# Altium PCB signal_circuit_PCB.PcbDoc
Units mil, origin at the board's own origin, x right, y up, seen from the top; angles counter-clockwise.
Board outline 1021.03 x 2013.03 mil, 2 copper layers (Top Layer, Bottom Layer); 26 components, 14 nets, 80 pads, 13 vias.
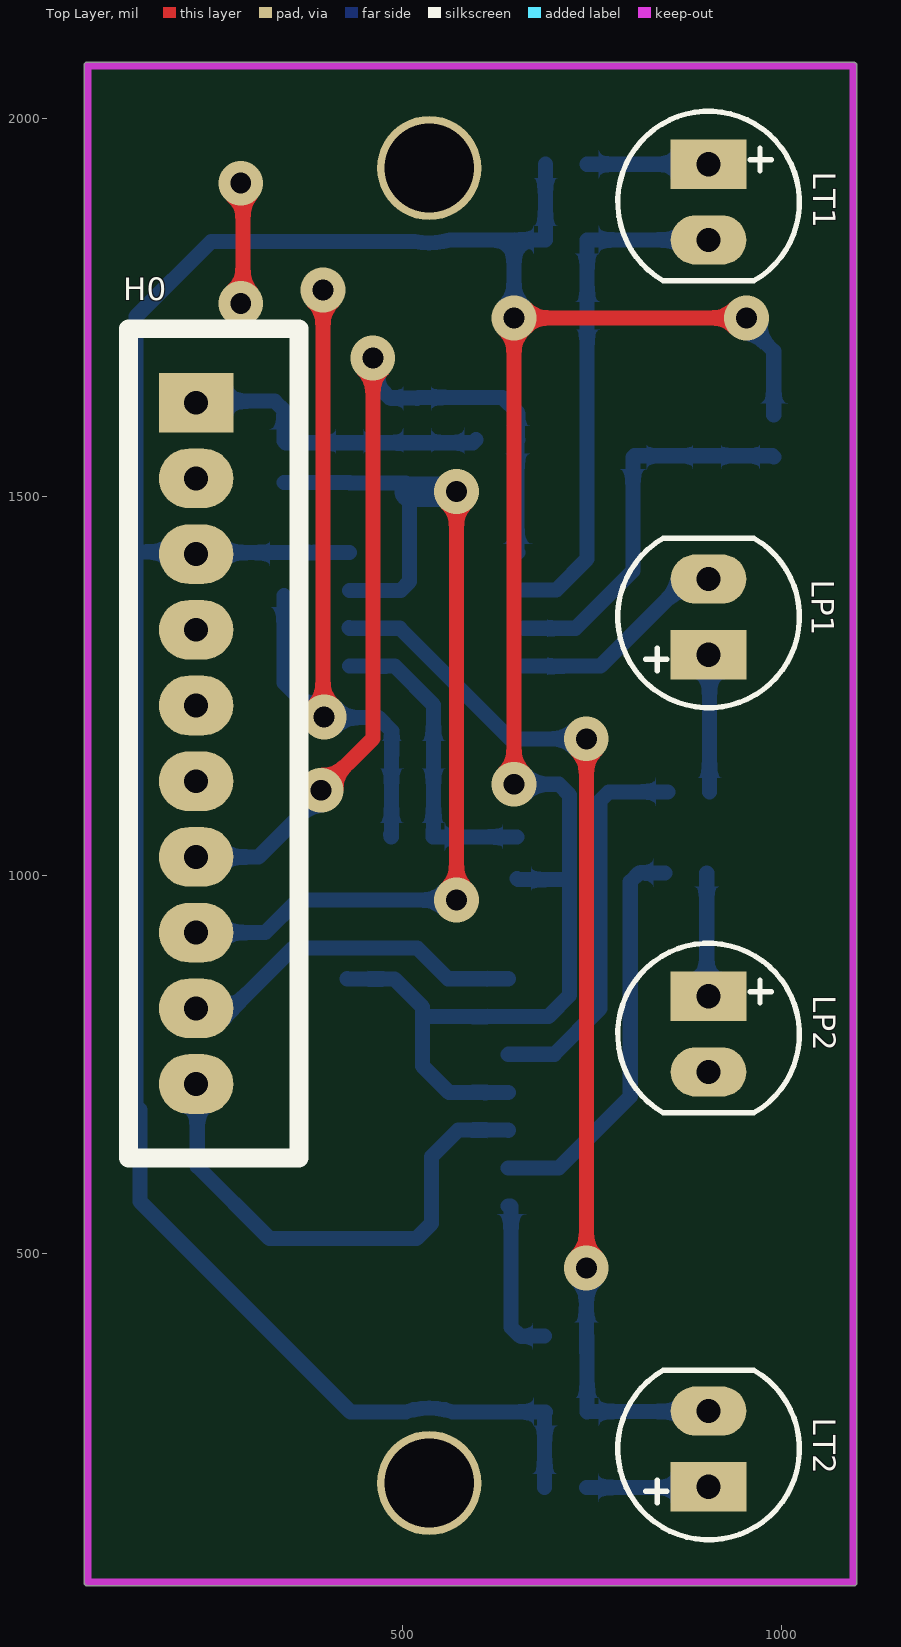
[diagram p0: Top Layer view]
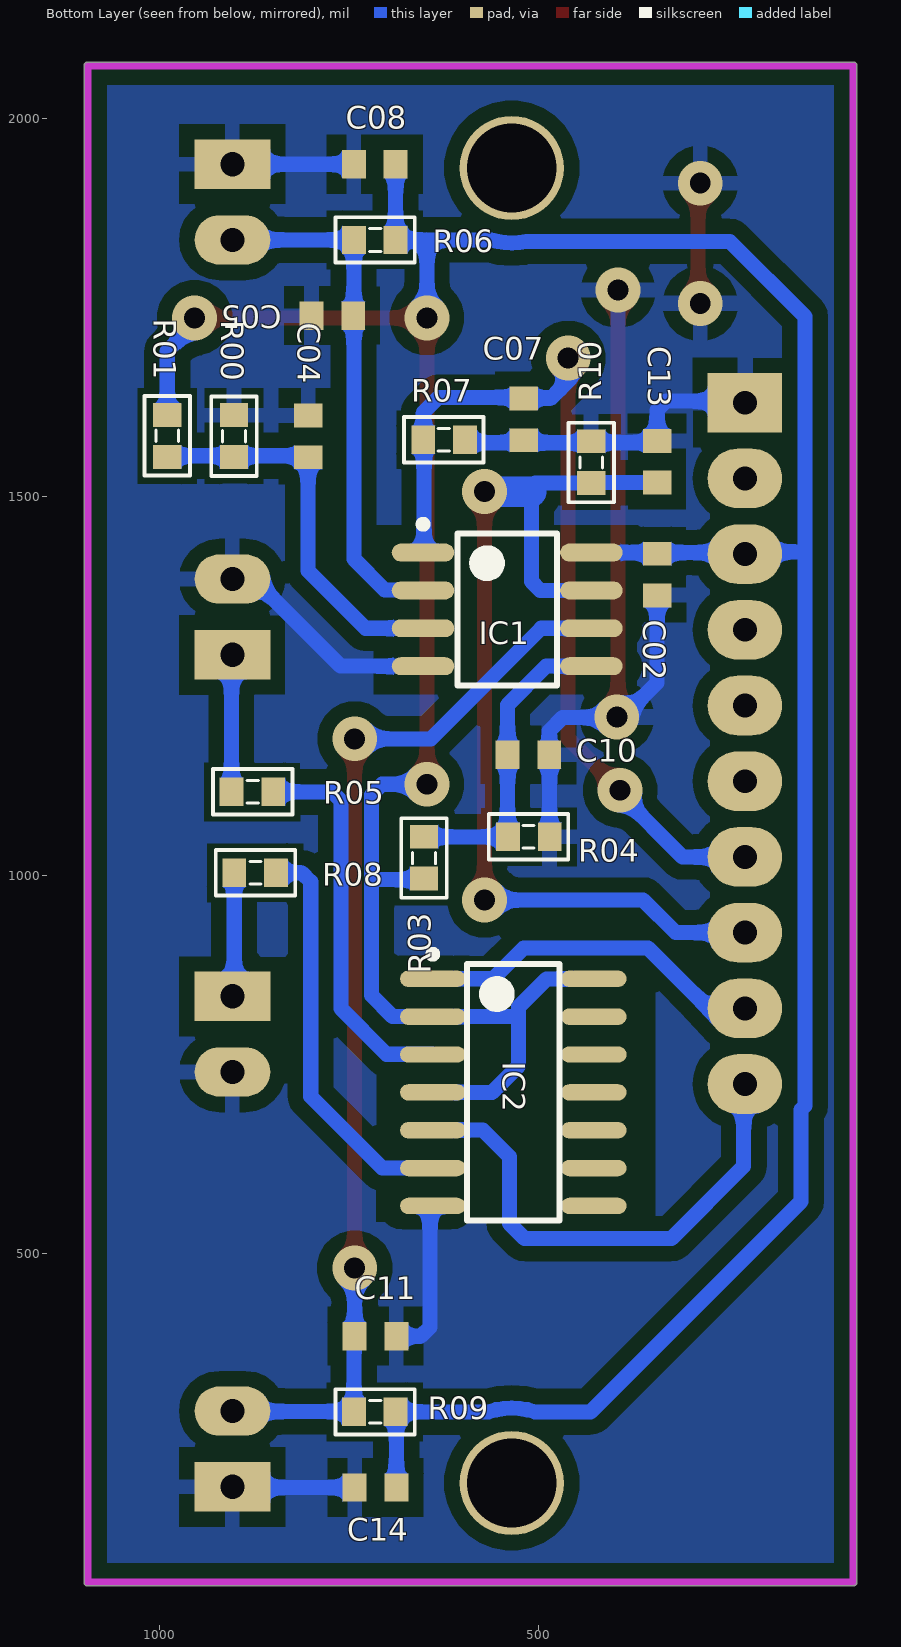
[diagram p1: Bottom Layer view, seen from below]
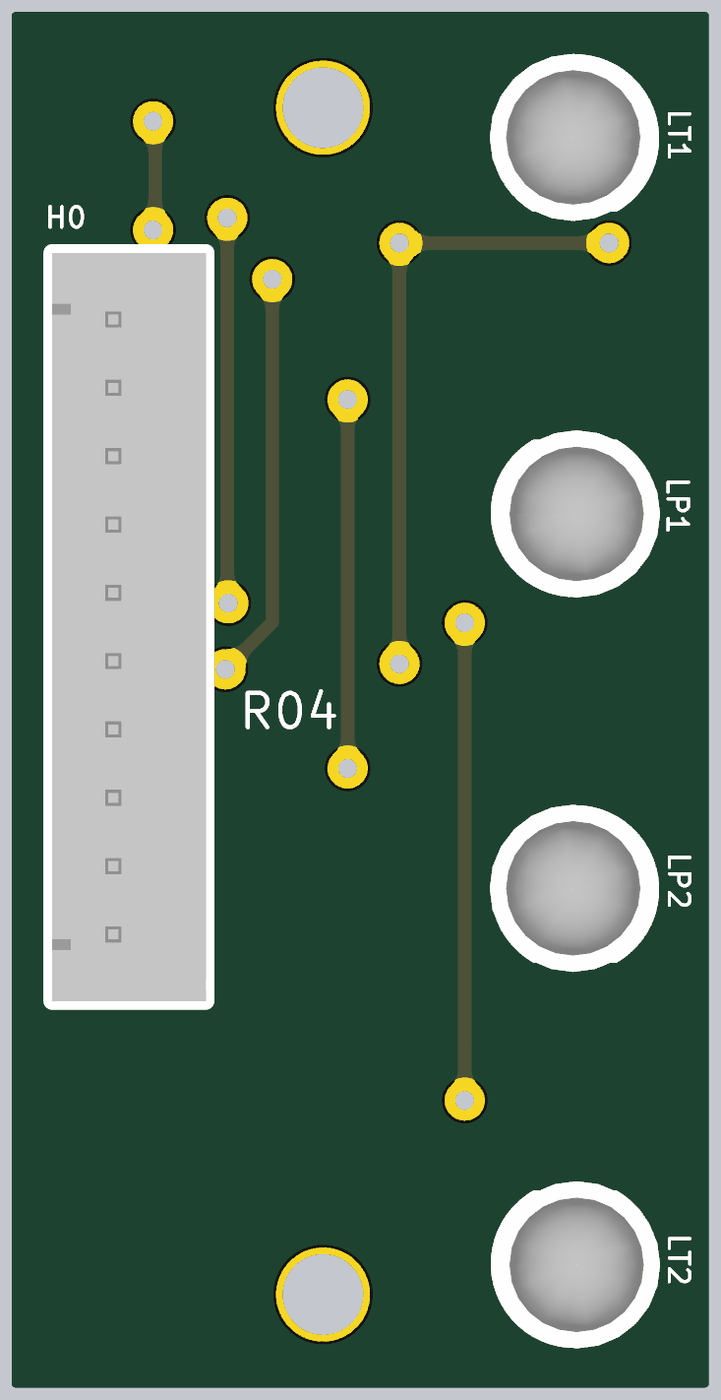
[diagram p2: 3D render of the assembled board from above, using the file's embedded part models]
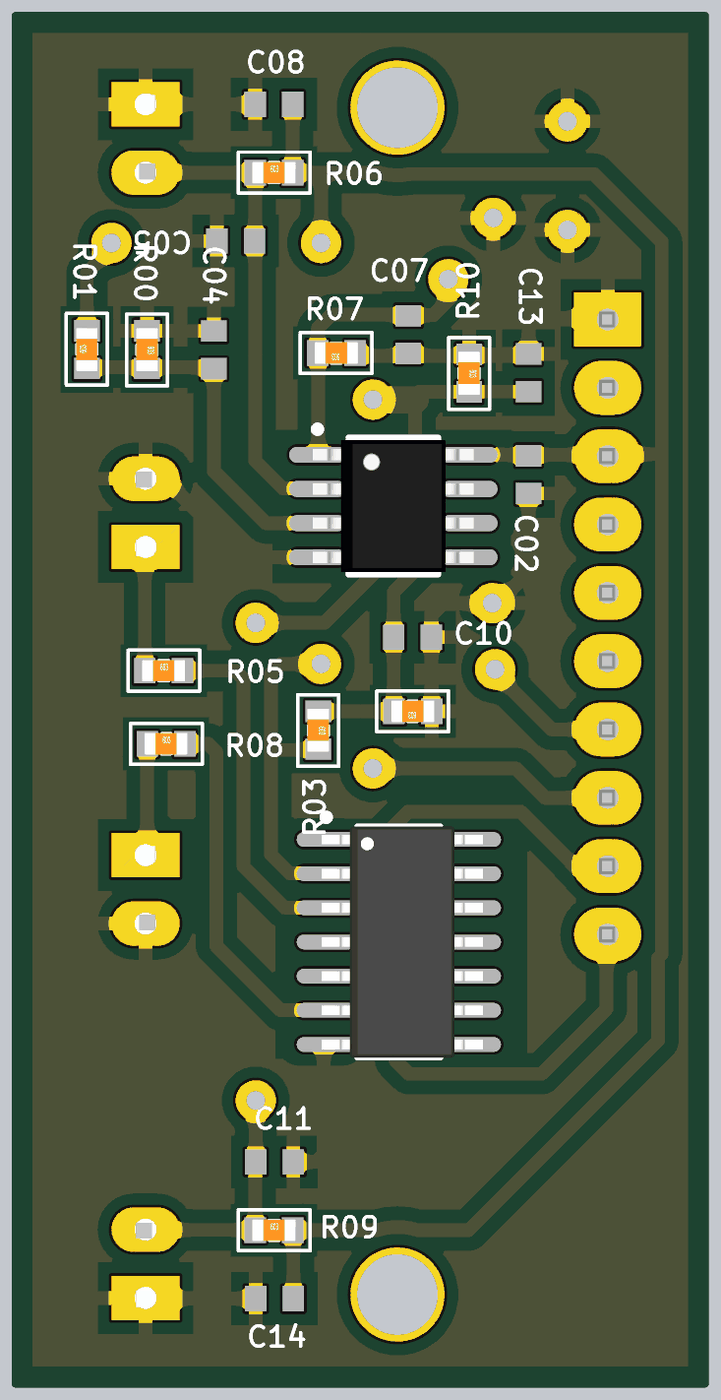
[diagram p3: 3D render of the assembled board from below, using the file's embedded part models]

## Layer stack, top to bottom
Top Solder: solder mask 0.4, Solder Resist, Dk 3.5
Top Layer: signal copper 1.4
Dielectric 1: dielectric 12.6, FR-4, Dk 4.8
Bottom Layer: signal copper 1.4
Bottom Solder: solder mask 0.4, Solder Resist, Dk 3.5

## Board outline
78.98,66 ccw(c84,66) 84,60.99 1095,60.99 ccw(c1095,66) 1100.02,66 1100.02,2069 ccw(c1095,2069) 1095,2074.02 84,2074.02 ccw(c84,2069) 78.99,2069

## Design rules (kind name [scope] priority, off if disabled: settings)
Clearance [All] p1: gap=20 ignorepadtopadclearanceinfootprint=FALSE
PolygonConnect [All] p1: connectstyle=Relief reliefconductorwidth=20 reliefentries=4 polygonreliefangle="90 Angle" airgapwidth=20
RoutingVias [All] p1: holewidth=28 width=50 viastyle="Through Hole" minholewidth=10 minwidth=10 maxholewidth=28 maxwidth=118.11
SolderMaskExpansion [All] p1: expansion=4 istentingtop=FALSE
Width [All] p1: maxlimit=50 minlimit=10 preferedwidth=20 minimp=50.000000 maximp=50.000000 favimp=50.000000
30 further rules are at their usual default settings.

## Components (designator, comment, footprint, x,y, rotation, side; value= is the part's Value field where it differs from the comment)
C02 "Cap Non-Pol SMD" CAP-SM-0603 343,1397 r270 bottom value=0.1uF
C04 "Cap Non-Pol SMD" CAP-SM-0603 804,1579.56 r270 bottom value=0.1uF
C05 "Cap Non-Pol SMD" CAP-SM-0603 772,1739 r0 bottom value=0.1uF
C07 "Cap Non-Pol SMD" CAP-SM-0603 519,1602 r270 bottom value=0.1uF
C08 "Cap Non-Pol SMD" CAP-SM-0603 716,1939 r0 bottom value=0.1uF
C10 "Cap Non-Pol SMD" CAP-SM-0603 513,1159 r180 bottom value=0.1uF
C11 "Cap Non-Pol SMD" CAP-SM-0603 715,391 r180 bottom value=0.1uF
C13 "Cap Non-Pol SMD" CAP-SM-0603 343,1546 r90 bottom value=0.1uF
C14 "Cap Non-Pol SMD" CAP-SM-0603 715,191 r0 bottom value=0.1uF
H0 "RIGHT" XH2.54M-10 227,1624 r270 top
IC1 "LM358" SO8 541,1351 r180 bottom
IC2 "7408" SO14 533,713 r180 bottom
LP1 "LED 5mm" LED-5MM-WHITE 904,1341.04 r90 top
LP2 "LED 5mm" LED-5MM-WHITE 904,789.96 r270 top
LT1 "LED 5mm" LED-5MM-WHITE 904,1889 r270 top
LT2 "LED 5mm" LED-5MM-WHITE 904,242 r90 top
R00 "RESISTOR SMD" RES-SM-0603 901.9,1607 r270 bottom value=27k
R01 "RESISTOR SMD" RES-SM-0603 990,1553 r90 bottom value=18k
R03 "RESISTOR SMD" RES-SM-0603 651,1050 r270 bottom value=18k
R04 "RESISTOR SMD" RES-SM-0603 485.44,1050.55 r0 bottom value=27k
R05 "RESISTOR SMD" RES-SM-0603 904.56,1110 r180 bottom value=220
R06 "RESISTOR SMD" RES-SM-0603 743,1839 r180 bottom value=10K
R07 "RESISTOR SMD" RES-SM-0603 597.44,1575 r0 bottom value=10K
R08 "RESISTOR SMD" RES-SM-0603 901,1003 r180 bottom value=220
R09 "RESISTOR SMD" RES-SM-0603 743,291 r180 bottom value=10K
R10 "RESISTOR SMD" RES-SM-0603 430,1572.56 r270 bottom value=10K

## Footprints (in the part's own frame and the unit in brackets; to place one, negate y for a bottom-side part, rotate by r counter-clockwise, add the part's x,y. Pads: shape width x height; smd on the part's side, far side on the other; paste and mask are expansions set on the pad)
CAP-SM-0603 [mm] "SMD Ceramic Capacitor Size 0603"
  rect 0.8x0.95 smd: 1(-0.7,0) 2(0.7,0)
  body extent -0.85,-0.45 0.85,0.45, height 0.6
LED-5MM-WHITE [mil] "LED 2 PIN, 5 ly , Only colour, pin to pin 110mil"
  rect 65x100 hole 32: 1(-50,0)
  oval 65x100 hole 32: 2(50,0)
  silkscreen extent -120,-120 104,120, body extent -124,-125 121,120, height 340
RES-SM-0603 [mm]
  rect 0.8x0.95 smd: 1(-0.014,0) 2(1.386,0)
  silkscreen extent -0.64,-0.76 2.03,0.76, body extent -0.11,-0.4 1.49,0.4, height 0.3
SO8 [mm] "SOIC, 8-Leads, Body 4.9x3.9mm, Pitch 1.27mm, IPC High Density"
  oval 2.1x0.6 smd: 1(-2.825,1.905) 2(-2.825,0.635) 3(-2.825,-0.635) 4(-2.825,-1.905) 5(2.825,-1.905) 6(2.825,-0.635) 7(2.825,0.635) 8(2.825,1.905)
  silkscreen extent -2.95,-2.55 1.68,2.98, body extent -2.99,-2.45 3,2.45, height 1.6
SO14 [mm] "SOIC, 14-Leads, Body 8.60x3.90mm, Pitch 1.27mm, IPC Medium Density"
  oval 2.2x0.55 smd: 1(-2.7,3.81) 2(-2.7,2.54) 3(-2.7,1.27) 4(-2.7,0) 5(-2.7,-1.27) 6(-2.7,-2.54) 7(-2.7,-3.81) 8(2.7,-3.81) 9(2.7,-2.54) 10(2.7,-1.27) 11(2.7,0) 12(2.7,1.27) 13(2.7,2.54) 14(2.7,3.81)
  silkscreen extent -2.83,-4.3 1.55,4.76, body extent -2.87,-4.3 3.13,4.3, height 1.75
XH2.54M-10 [mm]
  rect 2x2.5 hole 0.8: 1(0,0)
  oval 2x2.5 hole 0.8: 2(2.54,0) 3(5.08,0) 4(7.62,0) 5(10.16,0) 6(12.7,0) 7(15.24,0) 8(17.78,0) 9(20.32,0) 10(22.86,0)
  silkscreen extent -2.48,-2.26 25.34,3.46, body extent -2.48,-2.26 25.34,3.48, height 6.91

## Part data
C02 C04 C05 C07 C08 C10 C11 C13 C14: "Capacitor"
H0: library part "Header 10P 2.54 Duc Thang", "Cắm", Chung_Loai=Cắm, Don_Vi=Con, Ma_Hang=MH001286, Ten_Linh_Kien="Header 10P XH2.54-10P Đực Thẳng"
IC1: "Low-Power Dual Operational Amplifier"
IC2: "Quad 2-Input AND Gate"
LP1 LP2 LT1 LT2: library part "LED 5mm Trang", "Cắm", Chung_Loai=Cắm, Don_Vi=Con, Ma_Hang=MH008983, Ten_Linh_Kien="Led 5MM Trắng Đục (1000c)"
R00 R01 R03 R04 R05 R06 R07 R08 R09 R10: "Resistor"

## Free pads (board coordinates)
  round 137.8 hole 118.11: 15(535,197) 15(535,1934)

## Via types
v1: diameter 59.06, hole 27.56, Top Layer to Bottom Layer, 13 vias

## Nets (pads, with @x,y where several pads share a name; then routed paths per layer and width w, separated by ;. In a path a pad name is that pad's centre, name@x,y a point inside that pad or via, vN(x,y) a via of type N, cw(c..) or ccw(c..) an arc to the next point about the centre after c; other vN are vias at no path point)
GND: C02.2 C04.1 C05.2 C07.2 C08.2 C10.2 C11.2 C13.2 C14.2 H0.1 IC1.4 IC2.7 LP1.2 LP2.2 LT1.1 LT2.1 R00.1 R04.1 R07.1 R10.1 | length 2405.3
  Top Layer w20: v1(286,1755) 289,1758 289,1910.98 v1(285.98,1914) ; v1(394.74,1772.74) 394.74,1210.26 v1(396.15,1208.85)
  Bottom Layer w20: H0.1 233,1624 235,1626 331,1626 343,1614 C13.2 345.56,1571 592.88,1571 R07.1 ; C02.2 343,1254.03 388.18,1208.85 v1(396.15,1208.85) 397.04,1207.96 467.98,1207.96 485.44,1190.49 C10.2 485.16,1158.72 485.16,1054.82 484,1053.66 484.88,1052.78 R04.1 ; IC2.7 642.24,563 643,562.24 643,402.72 654.72,391 C11.2 ; IC1.4 761,1276 876.04,1391.04 LP1.2 ; C14.2 882,191 883,190 885,192 LT2.1 ; C08.2 LT1.1
IR_S1: C07.1 H0.7 IC1.1 R07.2 | length 1231.5
  Top Layer w20: v1(392.01,1112.09) 460.53,1180.61 v1(460.53,1682.92)
  Bottom Layer w20: H0.7 309.37,1024 390.91,1105.54 v1@390.91,1112.09 ; v1(460.53,1682.92) 456.57,1678.96 456.57,1656.43 482.78,1630.22 518.34,1630.22 C07.1 520.44,1631 632,1631 651.56,1611.44 651.56,1575.44 R07.2 ; R07.2@651,1574 651,1427.22 IC1.1
IR_S2: C13.1 H0.8 IC1.7 R10.2 | length 1334.5
  Top Layer w20: v1(571,967) v1(570.98,1506.79)
  Bottom Layer w20: H0.8 318.43,924 361.43,967 v1(571,967) ; C13.1 R10.2@430,1518.44 ; IC1.7 497.28,1376 509,1387.72 509,1506.28 ; R10.2 504,1518 509,1513
  Bottom Layer w40: 509,1506.28 570.48,1506.28 v1(570.98,1506.79)
LP1: H0.9 IC2.1 | length 462.3
  Bottom Layer w20: H0.9 275,824 354.83,903.83 519.17,903.83 560,863 IC2.1
LP2: H0.10 IC2.5 | length 670.5
  Bottom Layer w20: H0.10 228.66,722.34 228.66,615.34 324,520 518,520 538,540 538,628 573.32,663.32 638.98,663.32 IC2.5
NetC04_2: C04.2 IC1.3 R00.2 R01.1 | length 513
  Bottom Layer w20: IC1.3@660,1326 728,1326 804,1402 C04.2 806,1554 988.44,1554 R01.1
NetC05_1: C05.1 IC1.2 LT1.2 R06.1 | length 690.4
  Bottom Layer w20: IC1.2 652.91,1376.69 702.69,1376.69 743.56,1417.56 743.56,1739 R06.1 LT1.2
NetC10_1: C10.1 IC1.5 R03.1 R04.2 | length 417.5
  Bottom Layer w20: IC1.5 489.43,1276 540.56,1224.87 540.56,1059.25 540,1058.69 R04.2 646.93,1050.56 R03.1
NetC11_1: C11.1 IC1.6 LT2.2 R09.1 | length 1430.2
  Top Layer w20: v1(742.56,481) v1(742.56,1180)
  Bottom Layer w20: IC1.6@429.09,1326.69 IC1.6 496,1326 642,1180 v1(742.56,1180) v1@740.56,1182 ; v1(742.56,481) C11.1 743,390.56 743,370 743.56,369.44 R09.1 744.06,291.5 875.5,291.5 879,288 883,292 LT2.2
NetIC2_3: IC2.3 R05.2 | length 515.4
  Bottom Layer w20: IC2.3 639.62,763.32 700.23,763.32 760.48,823.57 760.48,1098.28 772.2,1110 R05.2
NetIC2_6: IC2.6 R08.2 | length 534.9
  Bottom Layer w20: IC2.6 706,613 800.48,707.48 800.48,991.28 812.2,1003 R08.2
NetLP1_1: LP1.1 R05.1 | length 181.5
  Bottom Layer w20: LP1.1 905.12,1289.92 R05.1
NetLP2_1: LP2.1 R08.1 | length 164.1
  Bottom Layer w20: R08.1 901.56,842.4 LP2.1
VCC: C02.1 C08.1 C14.1 H0.3 IC1.8 IC2.2 IC2.4 IC2.14 R01.2 R03.2 R06.2 R09.2 | length 5001
  Top Layer w20: v1(647,1120) v1(647.01,1736) 935.01,1735.99 v1@954,1717
  Bottom Layer w20: 153,1427 227,1427 228,1426 227,1425 H0.3 263,1424 265,1426 343,1426 IC1.8 ; IC2.14 427.02,862.68 489.32,862.68 526,826 526,748 561,713 IC2.4 ; 528,813 IC2.2 639.62,813.32 692.51,813.32 720.48,841.29 720.48,1105.8 706.28,1120 v1(647,1120) ; v1(647.01,1736) 647,1839 ; R03.2 652.44,994 719,994 ; C14.1 687.44,290 R09.2 565.74,291 ccw(c535,197) 504.26,291 431,291 153,569 153,690.05 147.79,695.27 147.79,1427 147.79,1737.79 247,1837 515.72,1837 ccw(c535,1934) 562.49,1839 647,1839 ; C08.1 R06.2 647,1839 ; v1(954,1735.98) 954,1728 990,1692 R01.2
pads on no net: H0.2 H0.4 H0.5 H0.6 IC2.8 IC2.9 IC2.10 IC2.11 IC2.12 IC2.13

## Polygon pours and split planes (outlines as drawn)
GND on Bottom Layer "NONET_L-01_P-001" (solid, pour order 1): 82,2070 1095,2070 1095,65 82,65

## Keep-outs
Keep-Out Layer:
  lines w10: 84,66 1095,66 1095,2069 84,2069 84,66

## Other copper
Bottom Layer:
  pour cut-out: 369,1463 718,1463 718,1238 369,1238
  pour cut-out: 714,885 345,885 345,542 714,542